# Altium PCB activediffprobe.PcbDoc
Units mil, origin at the board's own origin, x right, y up, seen from the top; angles counter-clockwise.
Board outline 2716.54 x 1299.21 mil, 2 copper layers (Top Layer, Bottom Layer), stack 61.811 mil thick; 54 components, 26 nets, 201 pads, 87 vias.
Unrouted connection lines stored in the file: 44.
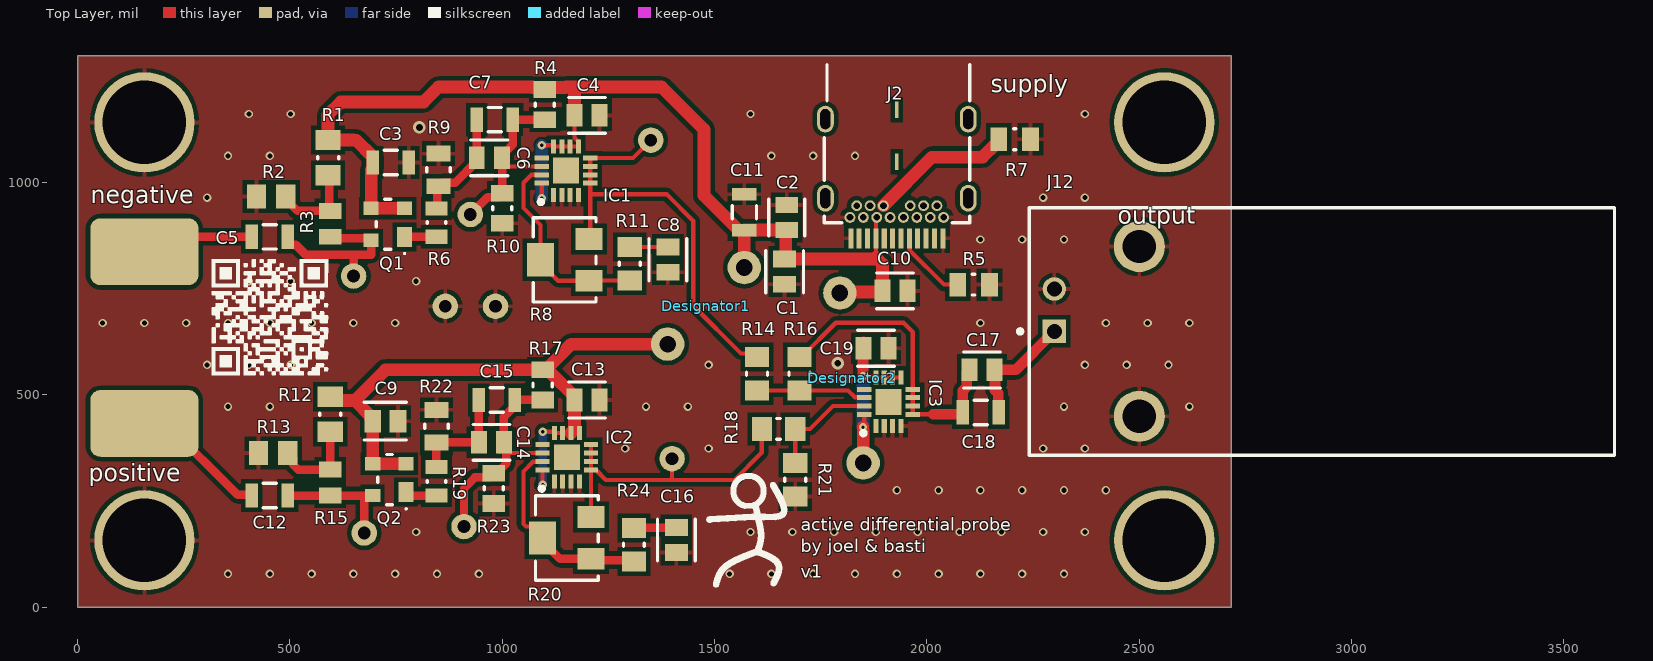
[diagram p0: Top Layer view]
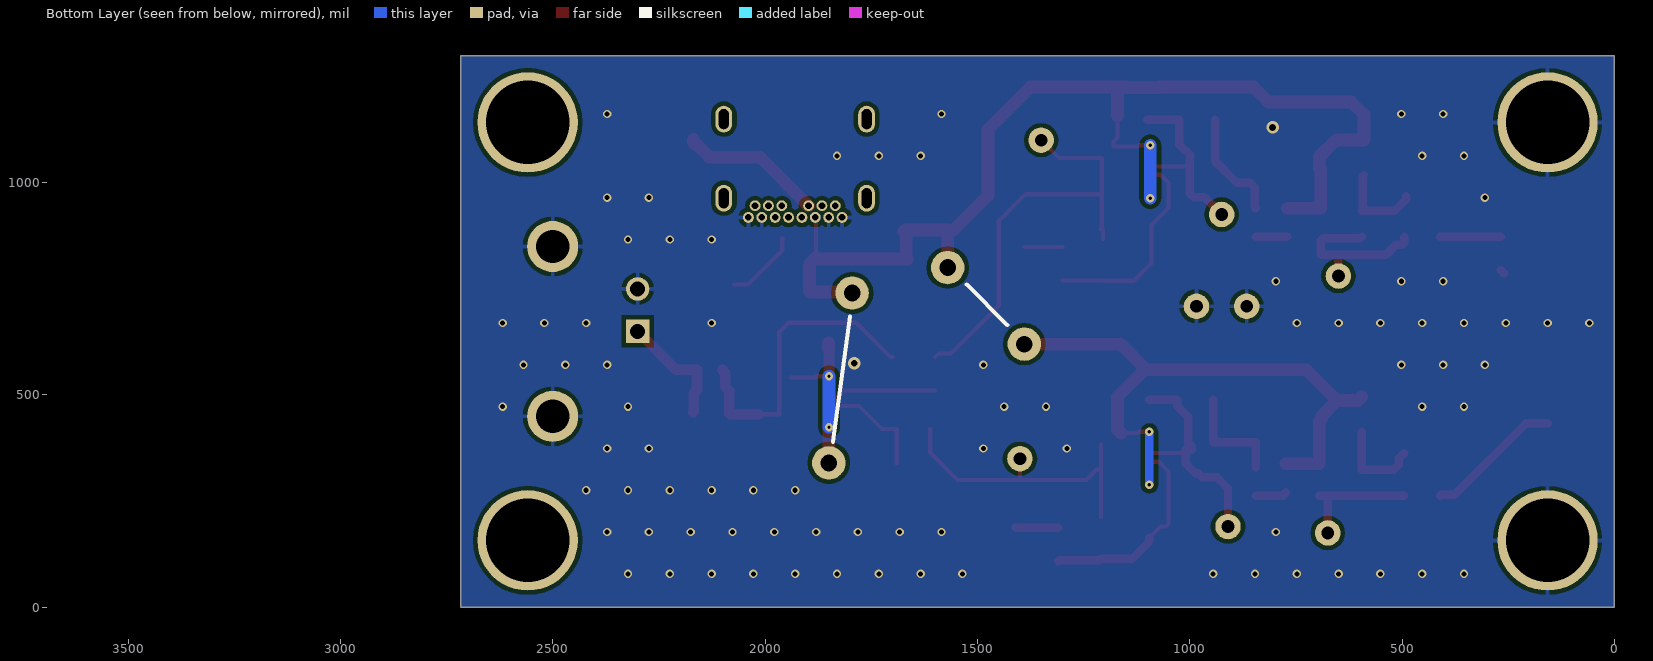
[diagram p1: Bottom Layer view, seen from below]
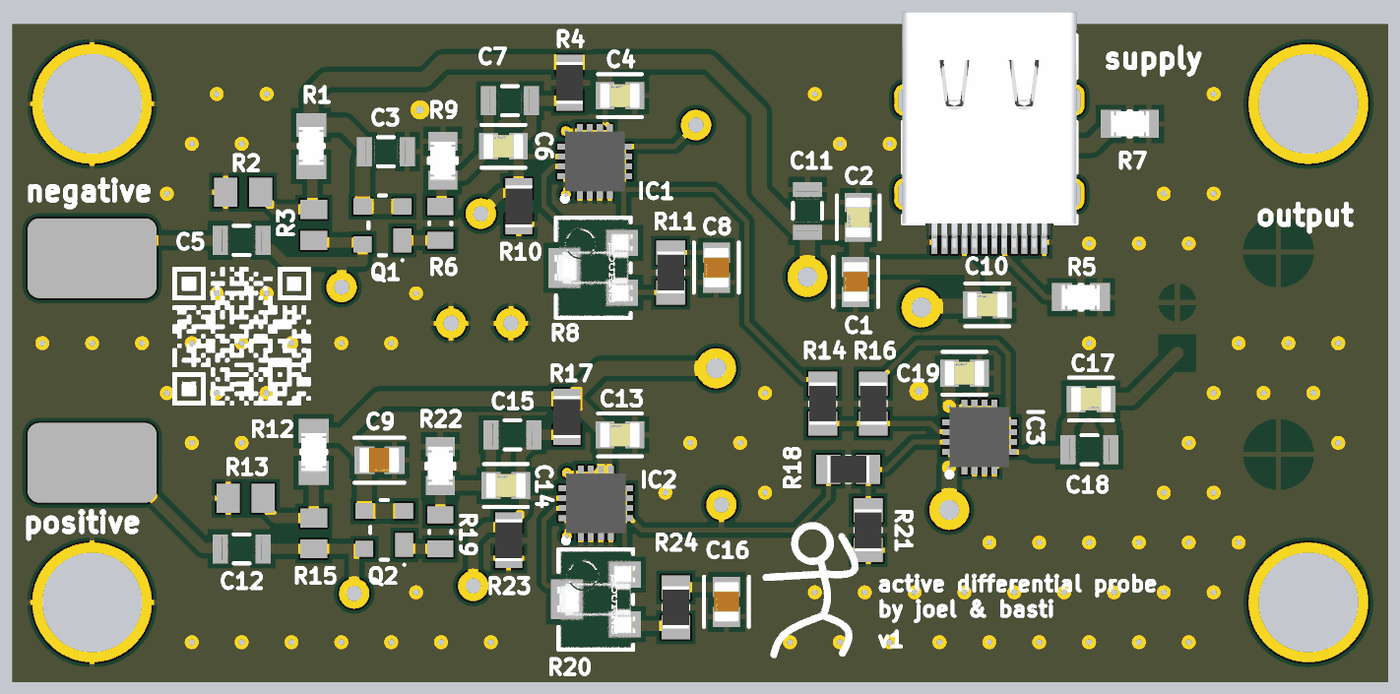
[diagram p2: 3D render of the assembled board from above, using the file's embedded part models]

## Layer stack, top to bottom
Top Solder: solder mask 0.5, Solder Resist, Dk 3.8
Top Layer: signal copper 1.378
Dielectric: core 59.055, FR-4, Dk 4.5
Bottom Layer: signal copper 1.378
Bottom Solder: solder mask 0.5, Solder Resist, Dk 3.8

## Board outline
0,0 0,1299.21 2716.54,1299.21 2716.54,0

## Design rules (kind name [scope] priority, off if disabled: settings)
Clearance [All] p1: gap=10 ignorepadtopadclearanceinfootprint=TRUE except(0: Arc-Hole Track-Hole SMDPad-Hole THPad-Hole Via-Hole Fill-Hole Poly-Hole Region-Hole Text-Hole)
PolygonConnect [All] p1: thpad.connectstyle=Relief thpad.reliefconductorwidth=10 thpad.reliefentries=4 thpad.polygonreliefangle="90 Angle" thpad.airgapwidth=10 smdpad.connectstyle=Relief smdpad.reliefconductorwidth=10 smdpad.reliefentries=4 smdpad.polygonreliefangle="90 Angle" smdpad.airgapwidth=10 via.connectstyle=Direct via.reliefconductorwidth=10 via.reliefentries=4 via.polygonreliefangle="90 Angle" via.airgapwidth=10
RoutingVias [All] p1: holewidth=28 width=50 viastyle="Through Hole" minholewidth=28 minwidth=50 maxholewidth=28 maxwidth=50
SolderMaskExpansion [All] p1: expansion=4 istentingtop=FALSE
Width 50R [InNet('NetC17_1')] p1: maxlimit=24.88 minlimit=24.88 preferedwidth=47.12 impedanceprofiledriven=TRUE impedanceprofileid={2A154028-B5BE-423F-ACD5-3DD682D5A0E4} impedanceprofilevalue=50.000000 minimp=50.000000 maximp=50.000000 favimp=50.000000
Width [All] p2: maxlimit=50 minlimit=10 preferedwidth=25 minimp=50.000000 maximp=50.000000 favimp=50.000000
30 further rules are at their usual default settings.

## Classes and differential pairs
component class Sheet2: C1 C2 C3 C4 C5 C6 C7 C8 C9 C10 C11 C12 C13 C14 C15 C16 C17 C18 C19 IC1 IC2 IC3 J2 J12 negative positive Q1 Q2 R2 R3 R4 R5 R6 R7 R8 R9 R10 R11 R12 R13 R14 R15 R16 R17 R18 R19 R20 R21 R22 R24

## Components (designator, comment, footprint, x,y, rotation, side; value= is the part's Value field where it differs from the comment)
C1 "LMR212BD7106KG-T" FP-0805-L_2_0_0_2-W_1_25-IPC_C 1665,790.39 r270 top
C2 "C0805C104K5RAC7411" FP-C0805C-DN-MFG 1670.08,917.72 r90 top locked value="0.10 μF"
C3 "CGA4F3X7R2E102K085AE" FP-CGA4J-IPC_B 737.4,1047.42 r0 top locked
C4 "C0805C104K5RAC7411" FP-C0805C-DN-MFG 1199.61,1158.19 r0 top locked value="0.10 μF"
C5 "CGA4F3X7R2E102K085AE" FP-CGA4J-IPC_B 452.76,872.42 r0 top locked
C6 "C0805C104K5RAC7411" FP-C0805C-DN-MFG 969.61,1058.19 r0 top locked value="0.10 μF"
C7 "CGA4F3X7R2E102K085AE" FP-CGA4J-IPC_B 982.4,1148.19 r0 top locked
C8 "LMR212BD7106KG-T" FP-0805-L_2_0_0_2-W_1_25-IPC_C 1390.08,818.58 r270 top locked
C9 "LMR212BD7106KG-T" FP-0805-L_2_0_0_2-W_1_25-IPC_C 724.69,438.19 r0 top locked
C10 "C0805C104K5RAC7411" FP-C0805C-DN-MFG 1925,745 r0 top value="0.10 μF"
C11 "CGA4F3X7R2E102K085AE" FP-CGA4J-IPC_B 1570.08,930.51 r90 top locked
C12 "CGA4F3X7R2E102K085AE" FP-CGA4J-IPC_B 452.76,263.19 r0 top locked
C13 "C0805C104K5RAC7411" FP-C0805C-DN-MFG 1199.61,488.19 r0 top locked value="0.10 μF"
C14 "C0805C104K5RAC7411" FP-C0805C-DN-MFG 974.61,388.19 r0 top locked value="0.10 μF"
C15 "CGA4F3X7R2E102K085AE" FP-CGA4J-IPC_B 987.4,488.19 r0 top locked
C16 "LMR212BD7106KG-T" FP-0805-L_2_0_0_2-W_1_25-IPC_C 1410.08,158.58 r270 top locked
C17 "C0805C104K5RAC7411" FP-C0805C-DN-MFG 2129.92,558.86 r180 top locked value="0.10 μF"
C18 "CGA4F3X7R2E102K085AE" FP-CGA4J-IPC_B 2126.77,458.86 r180 top locked
C19 "C0805C104K5RAC7411" FP-C0805C-DN-MFG 1880,610 r0 top value="0.10 μF"
Designator1 "Comment" Jumper#1 1389.69,619.69 r45 top
Designator2 "Comment" Jumper#2 2025,660 r270 top
IC1 "THS4302RGTR" QFN50P300X300X100-17N-D 1150.08,1028.19 r90 top locked
IC2 "THS4302RGTR" QFN50P300X300X100-17N-D 1152.17,353.35 r90 top locked
IC3 "THS4302RGTR" QFN50P300X300X100-17N-D 1909.45,483.86 r90 top locked
J2 "632723100011" 632723100011 1929.13,1102.36 r180 top locked
J12 "031-5540" FP-031-5540-MFG 2930.08,649.61 r90 top
negative "WIRE_PAD_7x4" WIRE_PAD_7x4-Footprint-1 157.48,837.18 r180 top locked (schematic designator negative-probe1)
positive "WIRE_PAD_7x4" WIRE_PAD_7x4-Footprint-1 157.48,433.07 r180 top locked (schematic designator positive-probe1)
Q1 "BF998" INF-SOT143-4-1_V 730.71,901.94 r180 top locked
Q2 "BF998" INF-SOT143-4-1_V 734.45,300.59 r180 top locked
R1 "CRCW08056K80FKEA" FP-CRCW0805-e3-IPC_A 590.08,1058.79 r90 top locked
R2 "ERJ-6ENF4701V" RESC2013X70X40NL20T20 455.63,967.42 r0 top locked
R3 "ERJ-6GEYJ106V" RESC2013X70X40LL20T20 595.08,902.93 r90 top locked
R4 "RC0805FR-0710KL" RESC2013X60X35NL10T20 1100.08,1183.62 r90 top locked
R5 "CRCW080556K0FKEA" FP-CRCW0805-e3-IPC_B 2110,760 r180 top
R6 "2R4 5% 0805(2012)" RESC0805(2012)_L 845.08,905.88 r270 top locked value="2.40 Ohm"
R7 "CRCW080556K0FKEA" FP-CRCW0805-e3-IPC_B 2206.66,1102.36 r0 top locked
R8 "3224W-1-103E" FP-3224W-MFG 1147.17,818.19 r180 top locked value=10kΩ
R9 "CRCW080524R0FKEA" FP-CRCW0805-e3-MFG 850.08,1029.8 r270 top locked
R10 "RC0805FR-0710KL" RESC2013X60X35NL10T20 1000,939.57 r90 top locked
R11 "RC0805FR-071KL" RESC2013X60X35ML10T20 1300.08,808.82 r270 top locked
R12 "CRCW08056K80FKEA" FP-CRCW0805-e3-IPC_A 595.08,454.56 r90 top locked
R13 "ERJ-6ENF4701V" RESC2013X70X40NL20T20 460.63,363.19 r0 top locked
R14 "RC0805FR-071KL" RESC2013X60X35ML10T20 1600,550 r90 top
R15 "ERJ-6GEYJ106V" RESC2013X70X40LL20T20 595.08,293.7 r90 top locked
R16 "RC0805FR-071KL" RESC2013X60X35ML10T20 1700,550 r270 top
R17 "RC0805FR-0710KL" RESC2013X60X35NL10T20 1095.08,523.62 r90 top locked
R18 "RC0805FR-071KL" RESC2013X60X35ML10T20 1650.63,420 r180 top locked
R19 "2R4 5% 0805(2012)" RESC0805(2012)_L 845.08,296.65 r270 top locked value="2.40 Ohm"
R20 "3224W-1-103E" FP-3224W-MFG 1152.17,163.19 r180 top locked value=10kΩ
R21 "RC0805FR-071KL" RESC2013X60X35ML10T20 1690,300 r270 top
R22 "CRCW080524R0FKEA" FP-CRCW0805-e3-MFG 845.08,426.57 r270 top locked
R23 "RC0805FR-0710KL" RESC2013X60X35NL10T20 980,280 r90 top
R24 "RC0805FR-071KL" RESC2013X60X35ML10T20 1310.08,147.56 r270 top locked

## Footprints (in the part's own frame and the unit in brackets; to place one, negate y for a bottom-side part, rotate by r counter-clockwise, add the part's x,y. Pads: shape width x height; smd on the part's side, far side on the other; paste and mask are expansions set on the pad)
632723100011 [mm] "USB 3.1 Type C Receptacle Horizontal THR"
  rect 0.3x1.2 smd: A1(-2.75,5.93) A2(-2.25,5.93) A3(-1.75,5.93) A4(-1.25,5.93) A5(-0.75,5.93) A6(-0.25,5.93) A7(0.25,5.93) A8(0.75,5.93) A9(1.25,5.93) A10(1.75,5.93) A11(2.25,5.93) A12(2.75,5.93)
  round 0.65 hole 0.4: B1(2.8,4.68) B2(2.4,3.98) B3(1.6,3.98) B4(1.2,4.68) B5(0.8,3.98) B6(0.4,4.68) B7(-0.4,4.68) B8(-0.8,3.98) B9(-1.2,4.68) B10(-1.6,3.98) B11(-2.4,3.98) B12(-2.8,4.68) G1(2,4.68) G2(-2,4.68)
  oval 1x1.6 hole 0.6 slot 1.2 at 90 deg: Shell(-4.27,3.53) Shell(-4.27,-1.2) Shell(4.27,3.53) Shell(4.27,-1.2)
  rect 0.2x1 smd: Shell(0,1.35) Shell(0,-1.75)
  silkscreen extent -4.37,-4.45 4.34,5, body extent -4.37,-5.6 4.37,6.19, height 3.05
FP-031-5540-MFG [mm]
  rect 1.4x1.4 hole 0.9 paste-1000 mask+0: 1(0,16)
  round 1.4 hole 0.9 paste-1000 mask+0: 2(2.54,16)
  round 3.05 hole 2 paste-1000 mask+0: 3(-5.08,10.92) 4(5.08,10.92)
  silkscreen extent -7.4,-17.5 7.4,18.17, body extent -7.5,-17.6 7.5,17.6, height 0.25
FP-0805-L_2_0_0_2-W_1_25-IPC_C [mil]
  rect 39.68x53.63 smd paste+0 mask+0: 1(-29.61,0) 2(29.61,0)
  silkscreen extent -49,-44 49,44, body extent -53,-32 53,32, height 10
FP-3224W-MFG [mm]
  rect 1.6x1.3 smd paste+0 mask+0: 1(-1.45,1.25) 3(-1.45,-1.25)
  rect 1.6x2 smd paste+0 mask+0: 2(1.45,0)
  silkscreen extent -1.88,-2.52 1.88,2.52, body extent -2.35,-2.63 2.35,2.63, height 0.25
FP-C0805C-DN-MFG [mm]
  rect 0.95x1.35 smd paste+0 mask+0: 1(-0.75,0) 2(0.75,0)
  silkscreen extent -1.1,-1.07 1.1,1.07, body extent -1.4,-0.85 1.4,0.85, height 0.25
FP-CGA4J-IPC_B [mm]
  rect 0.756x1.456 smd paste+0 mask+0: 1(-1.075,0) 2(1.075,0)
  silkscreen extent -0.4,-0.73 0.4,0.73, body extent -1.7,-0.98 1.7,0.98, height 0.25
FP-CRCW0805-e3-IPC_A [mil]
  rect 47.5x59.38 smd paste+0 mask+0: 1(-41.37,0) 2(41.37,0)
  silkscreen extent -3,-25 3,25, body extent -85,-49 85,49, height 10
FP-CRCW0805-e3-IPC_B [mil]
  rect 39.63x55.44 smd paste+0 mask+0: 1(-37.44,0) 2(37.44,0)
  silkscreen extent -3,-25 3,25, body extent -67,-38 67,38, height 10
FP-CRCW0805-e3-MFG [mm]
  rect 0.95x1.45 smd paste+0 mask+0: 1(-0.975,0) 2(0.975,0)
  silkscreen extent -0.13,-0.7 0.13,0.7, body extent -1.55,-0.82 1.55,0.82, height 0.25
INF-SOT143-4-1_V [mm] "SOT143, 4-Leads, Body 2.9x1.3 mm"
  rect 0.9x1.2 smd: 1(-1,0.75)
  rect 0.9x0.8 smd: 2(-1,-0.95) 3(1,-0.95) 4(1,0.95)
  silkscreen extent -1.05,-1.5 0.7,1.8, body extent -0.65,-1.45 0.65,1.45, height 1.1
Jumper#1 [mm]
  round 2 hole 1: 1(0,0) 2(6.477,0)
Jumper#2 [mm]
  round 2 hole 1: 1(-2.032,-5.842) 2(8.128,-4.445)
QFN50P300X300X100-17N-D [mm]
  rect 0.85x0.3 smd: 1(-1.45,0.75) 2(-1.45,0.25) 3(-1.45,-0.25) 4(-1.45,-0.75) 9(1.45,-0.75) 10(1.45,-0.25) 11(1.45,0.25) 12(1.45,0.75)
  rect 0.3x0.85 smd: 5(-0.75,-1.45) 6(-0.25,-1.45) 7(0.25,-1.45) 8(0.75,-1.45) 13(0.75,1.45) 14(0.25,1.45) 15(-0.25,1.45) 16(-0.75,1.45)
  rect 1.55x1.55 smd: 17(0,0)
  silkscreen extent -2,1.37 -1.75,1.62, body extent -1.5,-1.5 1.5,1.5, height 1
RESC0805(2012)_L [mm] "Chip Resistor, Body 2.0x1.3mm, IPC High Density"
  rect 0.85x1.3 smd: 1(-0.85,0) 2(0.85,0)
  silkscreen extent -0.05,-0.55 0.05,0.55, body extent -1.1,-0.67 1.1,0.68, height 0.7
RESC2013X60X35ML10T20 [mm] "Chip Resistor, 2-Leads, Body 2.1x1.35mm, IPC Low Density"
  rect 1.2x1.45 smd: 1(-1,0) 2(1,0)
  silkscreen extent -0.1,-0.63 0.1,0.63, body extent -1.05,-0.68 1.05,0.67, height 0.6
RESC2013X60X35NL10T20 [mm] "Chip Resistor, 2-Leads, Body 2.1x1.35mm, IPC Medium Density"
  rect 1x1.35 smd: 1(-0.9,0) 2(0.9,0)
  silkscreen extent -0.1,-0.58 0.1,0.58, body extent -1.05,-0.68 1.05,0.67, height 0.6
RESC2013X70X40LL20T20 [mm] "Chip Resistor, 2-Leads, Body 2.00x1.25mm, IPC High Density"
  rect 0.95x1.35 smd: 1(-0.775,0) 2(0.775,0)
  body extent -1.1,-0.72 1.1,0.72, height 0.7
RESC2013X70X40NL20T20 [mm] "Chip Resistor, 2-Leads, Body 2.2x1.35mm, IPC Medium Density"
  rect 1.15x1.45 smd: 1(-0.875,0) 2(0.875,0)
  body extent -1.1,-0.72 1.1,0.72, height 0.7
WIRE_PAD_7x4-Footprint-1 [mm]
  rrect30% 6.472x4 smd mask+0.102: 1(0,0)

## Part data
C1 C8 C9 C16: library part CMP-14477-005320-1, "Multilayer Ceramic Capacitor 10uF 10V X7T 10% SMD 0805 Automotive T/R", RoHS Compliant=Yes
C2 C4 C6 C10 C13 C14 C17 C19: library part CMP-2007-00277-3, "C0805 0.10 μF X7R 30ppm/°C 10.00% 50 V", Capacitance="0.10 μF", Manufacturer=KEMET, Package=C0805C-DN, Temperature="-55°C to +125°C", Temperature Characteristic=X7R, Temperature Coefficient=30ppm/°C, Temperature Range High=+125°C, Temperature Range Low=-55°C, Tolerance=0.1, Voltage Rating="50 V", Automotive=No, Category=Cap, ComponentLink2Description=Datasheet, ComponentLink2URL=https://content.kemet.com/datasheets/KEM_C1003_C0G_SMD.pdf, Device Class L1="Passive Components", Device Class L2=Capacitors, Device Class L3="Ceramic Capacitors", Height=0.88mm, Ipc Land Pattern Name=CAPC200125X78, Lead Free=Yes, Manufacturer Part Number=C0805C104K5RAC7411, Material=Ceramic, Octopart=https://octopart.com/c0805c104k5rac7411-kemet-18508045, RoHS=TRUE
C3 C5 C7 C11 C12 C15 C18: library part CMP-08246-002356-1, "Cap Ceramic 1nF 250V X7R 10% Pad SMD 0805 +125°C Automotive T/R", Capacitance=1nF, Case Code (Imperial)=0805, Case Code (Metric)=2012, Max Operating Temperature=125°C, Min Operating Temperature=-55°C, Ratings=AEC-Q200, Tolerance=10%, Voltage Rating=250V, Case/Package=0805, Features="Soft Termination", Length=0.079inch, Mount="Surface Mount", Packaging="Tape and Reel", Thickness=0.039inch, Width=0.047inch
IC1 IC2 IC3: "Integrated Circuit", Manufacturer_Name="Texas Instruments", Datasheet Link=http://www.ti.com/lit/gpn/ths4302, Height=1mm, Manufacturer_Part_Number=THS4302RGTR
J2: library part CMP-1502-03213-1, "USB 3.1 Type C Receptacle WR-COM, Horizontal, SMT / THT", Contact Resistance=30mOhm, Manufacturer="Wurth Elektronik", Operating Temperature=-40to105degC, Rated Current=5A, Working Voltage=20VDC, Connector Type=USB3.1TypeC, Datasheet URL=https://katalog.we-online.de/em/datasheet/632723x00011%282%29.pdf, Gender=Receptacle, Manufacturer URL=http://www.we-online.de, Mounting Technology=SMT/THT, Orientation=Horizontal, Package Reference=632723100011, Packaging=TapeandReel, Part Number=632723100011, Publisher=WurthElektronik
J12: library part CMP-20040-000002-1, "CONN BNC RCPT R/A 50 OHM PCB", Dielectric Material=Polypropylene, Frequency=1GHz, Manufacturer="Amphenol RF", Package=0, Temperature="-55°C to +85°C", Temperature Range High=+85°C, Temperature Range Low=-55°C, Automotive=No, Category=Conn, ComponentLink2Description=Datasheet, ComponentLink2URL=https://www.amphenolrf.com/downloads/dl/file/id/2040/product/579/031_5540_customer_drawing.pdf, Conn Orientation="Right Angle", Contact Material=Gold,Nickel, Device Class L1=Connectors, Device Class L2="RF / Coaxial Connectors", Device Class L3=unset, Digikey Description="CONN BNC RCPT R/A 50 OHM PCB", Height=13.4mm, Impedance=50Ω, Is Female=yes, Lead Free=Yes, Manufacturer Part Number=031-5540, Number of Contacts=2, Octopart=https://octopart.com/031-5540-amphenol+rf-49742301, Pitch=2.54mm, RoHS=TRUE
negative positive: library part CMP-019-00043-3, "SMD WIRE PAD 7 x 4 mm", Pins=1
Q1 Q2: library part CMP-1193-00001-1, "Silicon N-Channel MOSFET Tetrode, 30 mA ID, 20 dB Gp, SOT143-4-1, Green", Manufacturer=Infineon, ComponentLink1Description="Manufacturer URL", ComponentLink1URL=http://www.infineon.com/, ComponentLink2Description=Datasheet, ComponentLink2URL=http://www.infineon.com/dgdl/bf998series.pdf?folderId=db3a30431441fb5d0114936599851041&fileId=db3a30431441fb5d011493688fd31042&location=en.Products.RF.RF_MOSFET.Single_Non_Biased.DATASHEET.bf998series.pdf, ComponentLink3Description="Package Specification", ComponentLink3URL=http://www.infineon.com/dgdl/SOT143-Package_Overview.pdf?folderId=db3a30431936bc4b011952ce8b1b3bed&fileId=db3a30431936bc4b011952df42203c0c, DatasheetVersion=Apr-2007, F (typ)="1.8 dB", gfs (typ)="24 mS", Gp (typ)="20 dB", Green=yes, ID (max)="30 mA", Mounting Technology="Surface Mount", PackageDescription="4-Pin Small Outline Transistor Package, 1.3 x 2.9 mm Body", PackageReference=SOT143-4-1, PartNumber=BF998, Ptot (max)="200 mW"
R1 R12: library part CMP-2001-04088-2, "RES Thick Film, 6.8kΩ, 1%, 0.125W, 100ppm/°C, 0805", Case Code (Imperial)=0805, Case Code (Metric)=2012, Max Operating Temperature=155°C, Max Power Dissipation=125mW, Min Operating Temperature=-55°C, Package Quantity=10, Resistance=6.8kR, Temperature Coefficient=100ppm/°C, Tolerance=1%, Voltage Rating=150V, Case/Package=0805, Composition="Thick Film", Contact Plating=Tin, Depth=1.25mm, Features="Automotive AEC-Q200", Height=0.45mm, Lead Free="Lead Free", Length=2mm, Military Standard=Not, Mount="Surface Mount", Number of Terminations=2, Packaging="Tape and Reel", Power Rating=125mW, Radiation Hardening=No, Termination=SMD/SMT, Voltage Rating (DC)=150V, Weight=0.000194oz, Width=0.049inch
R2 R13: library part CMP-2001-00550-5, "Chip Resistor, 4.7 KOhm, +/- 1%, 0.125 W, -55 to 155 degC, 0805 (2012 Metric), RoHS, Tape and Reel", Manufacturer=Panasonic, Max Operating Temperature="155 degC", Min Operating Temperature="-55 degC", Package Quantity=5000, Voltage Rating="150 V", ComponentLink1Description="Manufacturer URL", ComponentLink1URL=http://www.panasonic.com/, ComponentLink2Description=Datasheet, ComponentLink2URL=http://industrial.panasonic.com/cdbs/www-data/pdf/RDA0000/AOA0000C86.pdf, DatasheetVersion=04/2015, Height="0.6 mm", Length="2 mm", Mount="Surface Mount", Mounting Technology="Surface Mount", PackageDescription="2-Pin Surface Mount Device, Body 2 x 1.25 mm", PackageReference=0805, Packaging="Tape and Reel", Pins=2, REACH SVHC=Yes, RoHSCompliant=true
R3 R15: library part CMP-2001-00340-1, "10MOhm", Manufacturer=Panasonic, Part Number=ERJ-6GEYJ106V
R4 R10 R17 R23: library part CMP-1659-00013-4, "Chip Resistor, 10 KOhm, +/- 1%, 0.125 W, -55 to 155 degC, 0805 (2012 Metric), RoHS, Tape and Reel", Manufacturer=Yageo, Max Operating Temperature="155 degC", Min Operating Temperature="-55 degC", Package Quantity=5000, Voltage Rating="150 V", ComponentLink1Description="Manufacturer URL", ComponentLink1URL=http://www.yageo.com/, ComponentLink2Description=Datasheet, ComponentLink2URL=http://www.yageo.com/documents/recent/PYu-RC_Group_51_RoHS_L_04.pdf, DatasheetVersion="Rev. 4, 02/2016", Height="0.5 mm", Length="2 mm", Mount="Surface Mount", Mounting Technology="Surface Mount", PackageDescription="2-Pin Surface Mounted Device, Body 2 x 1.25 mm", PackageReference=0805, Packaging="Tape and Reel", Pins=2, REACH SVHC="No SVHC", RoHSCompliant=true
R5 R7: library part CMP-2001-04015-2, "RES Thick Film, 56kΩ, 1%, 0.125W, 100ppm/°C, 0805", Case Code (Imperial)=0805, Case Code (Metric)=2012, Max Operating Temperature=155°C, Max Power Dissipation=125mW, Min Operating Temperature=-55°C, Package Quantity=10, Resistance=56kR, Temperature Coefficient=100ppm/°C, Tolerance=1%, Voltage Rating=150V, Case/Package=0805, Composition="Thick Film", Contact Plating=Tin, Depth=1.25mm, Features="Automotive AEC-Q200", Height=0.45mm, Lead Free="Lead Free", Length=2mm, Military Standard=Not, Mount="Surface Mount", Number of Pins=2, Number of Terminations=2, Packaging="Tape and Reel", Power Rating=125mW, Radiation Hardening=No, Termination=SMD/SMT, Voltage Rating (DC)=150V, Weight=0.000194oz, Width=1.25mm
R6 R19: library part CMP-1013-00011-1, "2R4 0.125W 5% 0805 (2012 Metric)  SMD", Case-EIA=0805, Case-Metric=2012, Power="0.125 W", Tolerance="5 %", Technology=SMT
R8 R20: library part CMP-2000-05077-2, "TRIMMER 10K OHM 0.25W J LEAD TOP", Manufacturer=Bourns, Package=3224W, Power Rating=250mW, Resistance=10kΩ, Temperature="-65°C to +150°C", Temperature Coefficient=100ppm/°C, Temperature Range High=+150°C, Temperature Range Low=-65°C, Tolerance=10%, Voltage Rating=300V, Automotive=No, Category=Res, ComponentLink2Description=Datasheet, ComponentLink2URL=https://upverter.com/datasheet/a166fca85da25564670351d2dc712345c058bc40.pdf, Composition=Cermet, Device Class L1="Passive Components", Device Class L2=Resistors, Device Class L3="Variable Resistors and Potentiometers", Digikey Description="TRIMMER 10K OHM 0.25W J LEAD TOP", Height=5.55mm, Lead Free=Yes, Manufacturer Part Number=3224W-1-103E, Mouser Description="Trimmer Resistors - SMD 4mm 10Kohms 10% Square Cermet Sealed", Octopart=https://octopart.com/3224w-1-103e-bourns-14818, RoHS=TRUE, Series=3224, Standoff Height=0.2mm
R9 R22: library part CMP-2001-03718-2, "RES Thick Film, 24Ω, 1%, 0.125W, 100ppm/°C, 0805", Case Code (Imperial)=0805, Case Code (Metric)=2012, Max Operating Temperature=155°C, Max Power Dissipation=125mW, Min Operating Temperature=-55°C, Package Quantity=10, Resistance=24R, Temperature Coefficient=100ppm/°C, Tolerance=1%, Voltage Rating=150V, Case/Package=0805, Composition="Thick Film", Contact Plating=Tin, Depth=1.25mm, Features="Automotive AEC-Q200", Height=0.45mm, Lead Free="Lead Free", Length=2mm, Military Standard=Not, Mount="Surface Mount", Number of Pins=2, Number of Terminations=2, Packaging="Tape and Reel", Power Rating=125mW, Radiation Hardening=No, Termination=SMD/SMT, Voltage Rating (DC)=150V, Weight=0.000194oz, Width=0.049inch
R11 R14 R16 R18 R21 R24: library part CMP-2100-03671-1, "Chip Resistor, 1 KOhm, +/- 1%, 125 mW, -55 to 155 degC, 0805 (2012 Metric), RoHS, Tape and Reel", Case Code (Imperial)=0805, Case Code (Metric)=2012, Manufacturer=Yageo, Max Operating Temperature=155degC, Max Power Dissipation=125mW, Min Operating Temperature=-55degC, Package Description="2-Pin Surface Mounted Device, Body 2 x 1.25 mm", Package Quantity=1, Resistance=1KOhm, Temperature Coefficient=100ppm/degreesC, Tolerance=1%, Voltage Rating=150V, Case/Package=0805, Composition=ThickFilm, Datasheet URL=http://www.yageo.com/NewPortal/yageodocoutput?fileName=/pdf/R-Chip/PYu-RC_Group_51_RoHS_L_5.pdf, Datasheet Version="Rev. 5, 10/2016", Depth=1.25mm, Height=0.024inch, Lead Free=LeadFree, Length=0.079inch, Manufacturer URL=http://www.yageo.com/, Military Standard=Not, Number of Pins=2, Number of Terminations=2, Package Reference=0805, Packaging=TapeandReel, Power Rating=125mW, REACH SVHC=Unknown, RoHSCompliant=true, Termination=SMD/SMT, Voltage Rating (DC)=150V, Width=0.049inch

## Free pads (board coordinates)
  round 60 hole 30: 1(925,925) 2(675,175) 4(910,190) 5(1350,1100) 6(1400,350) 7(866.14,708.66) 8(984.25,708.66) 9(650,780)
  round 236.22 hole 196.85: 10(2559.06,1141.73) 11(2559.06,157.48) 12(157.48,157.48) 13(157.48,1141.73)

## Via types
v1: diameter 19.68, hole 11.81, Top Layer to Bottom Layer, 79 vias
v2: diameter 19.68, hole 7.87, Top Layer to Bottom Layer, 6 vias
v3: diameter 29.53, hole 15.75, Top Layer to Bottom Layer, 2 vias

## Nets (pads, with @x,y where several pads share a name; then routed paths per layer and width w, separated by ;. In a path a pad name is that pad's centre, name@x,y a point inside that pad or via, vN(x,y) a via of type N, cw(c..) or ccw(c..) an arc to the next point about the centre after c; other vN are vias at no path point)
+5: C1.1 C2.1 C3.1 C4.1 C9.1 C10.1 C11.1 C13.1 C19.1 Designator1.1 Designator1.2 Designator2.1 Designator2.2 IC1.9 IC1.10 IC1.11 IC1.12 IC1.16 IC2.9 IC2.10 IC2.11 IC2.12 IC2.16 IC3.9 IC3.10 IC3.11 IC3.12 IC3.16 J2.A9 J2.B4 Q1.2 Q1.3 Q2.2 Q2.3 R1.2 R4.2 R12.2 R17.2 | length 4669.2
  Top Layer w10: v2(1092.99,963.03) IC1.16 ; v2(1092.99,1088.03) 1119.65,1088.03 1120.55,1087.13 IC1.12 IC1.11 IC1.10 IC1.9 1179.61,1096.1 1170.08,1105.63 C4.1 ; IC2.16@1094.17,322.91 1095.08,322.91 v2(1095.08,288.19) ; v2(1095.08,413.19) 1121.73,413.19 1122.64,412.28 IC2.12 IC2.11 IC2.10 ; v2(1849.45,423.86) 1849.45,426.48 1852.36,429.39 IC3.16 ; v2(1849.45,543.86) 1879.02,543.86 1879.92,542.95 IC3.12 IC3.11 IC3.10 IC3.9 ; 1879.92,823.96 J2.A9 1879.92,916.14 J2.B4 ; 1880,820 1880,823.88
  Top Layer w25: v2(1849.45,543.86) 1849.45,608.98 C19.1
  Top Layer w30: R12.2 603.83,487.18 653.06,487.18 ; Q1.2 Q1.3 691.34,1030.12 695.08,1033.86 C3.1 695.08,1060.97 656.05,1100 650,1100 649.84,1100.16 R1.2 590,1100.24 590,1160 620,1190 815,1190 850,1225 1070.93,1225 1072.19,1223.74 1148.74,1223.74 1150,1225 1170.08,1225 ; Q2.2 Q2.3 C9.1 690.24,443.03 690.24,450 653.06,487.18 ; R17.2@1111.77,554.37 1170.08,496.06 C13.1 1170.08,418.5 IC2.10 ; C4.1 1170.08,1225 ; Designator1.1 1162.6,619.69 1101.97,559.06 R17.2 724.93,559.06 653.06,487.18 ; C11.1@1556.53,888.19 1475,969.72 1475,1125 1375,1225 1170.08,1225 ; Designator1.2 1570.04,800.04 C11.1 ; C11.1 C2.1 ; C1.1 1880,820 ; C1.1@1667.54,822.54 1667.54,885.65 C2.1 ; C2.1@1673.78,884.49 C2.1 ; Designator2.1 1797.5,742.5 1892.97,742.5 C10.1 1895.47,808.41 1880,823.88 1879.92,823.96 ; v2(1849.45,423.86) 1850,423.31 Designator2.2 ; C19.1 C19.1@1850.47,622.13
  Bottom Layer w20: v2(1095.08,288.19) v2(1095.08,413.19)
  Bottom Layer w25: J2.B4@1881.78,918 J2.B4
  Bottom Layer w30: v2(1092.99,963.03) v2(1092.99,1088.03) ; v2(1849.45,423.86) v2(1849.45,543.86)
GND: C1.2 C2.2 C3.2 C4.2 C8.2 C9.2 C10.2 C11.2 C13.2 C16.2 C19.2 IC1.1 IC1.2 IC1.3 IC1.4 IC1.17 IC2.1 IC2.2 IC2.3 IC2.4 IC2.17 IC3.1 IC3.2 IC3.3 IC3.4 IC3.17 J2.A1 J2.A12 J2.B1 J2.B12 J2.G1 J2.G2 J12.2 J12.3 J12.4 pad.7 pad.8 pad.12 pad.13 R2.1 R5.1 R7.2 R9.1 R10.1 R13.1 R21.2 R22.1 R23.1
  other v1: 354.33,78.74 452.76,78.74 551.18,78.74 649.61,78.74 748.03,78.74 846.46,78.74 944.88,78.74 1535.43,78.74 1633.86,78.74 1732.28,78.74 1830.71,78.74 1929.13,78.74 2027.56,78.74 2125.98,78.74 2224.41,78.74 2322.83,78.74 797.24,177.17 1584.65,177.17 1683.07,177.17 1781.5,177.17 1879.92,177.17 1978.35,177.17 2076.77,177.17 2175.2,177.17 2273.62,177.17 2372.05,177.17 1929.13,275.59 2027.56,275.59 2125.98,275.59 2224.41,275.59 2322.83,275.59 2421.26,275.59 1289.37,374.02 1486.22,374.02 2273.62,374.02 2372.05,374.02 354.33,472.44 452.76,472.44 1338.58,472.44 1437.01,472.44 2322.83,472.44 2618.11,472.44 305.12,570.87 403.54,570.87 501.97,570.87 1486.22,570.87 2372.05,570.87 2470.47,570.87 2568.9,570.87 59.06,669.29 157.48,669.29 255.91,669.29 354.33,669.29 452.76,669.29 551.18,669.29 649.61,669.29 748.03,669.29 2125.98,669.29 2421.26,669.29 2519.69,669.29 2618.11,669.29 403.54,767.72 501.97,767.72 797.24,767.72 2125.98,866.14 2224.41,866.14 2322.83,866.14 305.12,964.57 2273.62,964.57 2372.05,964.57 354.33,1062.99 452.76,1062.99 1633.86,1062.99 1732.28,1062.99 1830.71,1062.99 403.54,1161.42 501.97,1161.42 1584.65,1161.42 2372.05,1161.42
  other v3: 1790,575 805,1130
NetC5_1: C5.1 negative.1 | length 153.8
  Top Layer w20: negative.1@259.84,786 negative.1@267.52,793.68 ; negative.1@267.52,872.42 C5.1
NetC5_2: C5.2 pad.9 Q1.4 R3.1 | length 406
  Top Layer w20: C5.2 495.08,858.64 499.96,853.75 513.74,853.75 537.49,830 650,830 ; R3.1 599.02,868.48 687.4,868.48 Q1.4 691.34,830 650,830 ; pad.9 650,830
NetC6_1: C6.1 C7.1 R6.1 R9.2 | length 266.4
  Top Layer w20: R6.1 847.58,941.85 847.58,988.92 R9.2 858.78,1000.12 889.88,1000.12 940.08,1050.31 C6.1 C7.1
NetC6_2: C6.2 C7.2 IC1.14 pad.1 R4.1 R10.2 | length 455.4
  Top Layer w10: C6.2 999.13,1051.73 999.57,1051.3 1012.83,1038.03 IC1.14
  Top Layer w20: pad.1 966.09,966.09 991.09,966.09 R10.2 999.57,975.43 C6.2@999.57,1051.3 ; C6.2 999.13,1066.06 1007.83,1074.76 1009.96,1074.76 1024.72,1089.52 C7.2 R4.1
NetC8_1: C8.1 R11.1 | length 90
  Top Layer w10: R11.1 C8.1
NetC12_1: C12.1 positive.1 | length 323.8
  Top Layer w20: positive.1@156.99,433.07 208.66,433.07 377.26,264.47 409.15,264.47 C12.1
NetC12_2: C12.2 pad.2 Q2.4 R15.1 | length 288.2
  Top Layer w20: C12.2 R15.1 675,263.19 ; pad.2 675,263.19 ; Q2.4 675,263.19
NetC14_1: C14.1 C15.1 R19.1 R22.2 | length 258.1
  Top Layer w20: R19.1 R22.2 C14.1 C15.1
NetC14_2: C14.2 C15.2 IC2.14 pad.4 R17.1 R23.2 | length 547.8
  Top Layer w10: C14.2@1004.13,380.31 1021.26,363.19 IC2.14
  Top Layer w20: pad.4 910,280 935.75,305.75 970.31,305.75 R23.2 986.89,315.43 1010,338.54 1010,371.61 1002.13,379.49 995.43,379.49 C14.2@995.43,370.87 ; C14.2 1004.13,448.82 1029.72,474.41 C15.2 R17.1
NetC16_1: C16.1 R24.1 | length 100.5
  Top Layer w20: R24.1 1310.71,187.56 1409.45,187.56 C16.1
NetC17_1: C17.1 C18.1 J12.1 | length 282.3
  Top Layer w24.88: C17.1 2209.41,558.86 J12.1
  Top Layer w25: C17.1 2160.52,557.79 2160.52,511.62 2167.9,504.25 2167.9,460.05 C18.1
NetC17_2: C17.2 C18.2 IC3.5 IC3.6 IC3.7 IC3.8 R16.1 | length 728.5
  Top Layer w10: R16.1 1704.92,589.37 1785.55,670 1945,670 1966.54,648.46 IC3.8 IC3.7 IC3.6 IC3.5 2014.89,454.33
  Top Layer w25: 2014.89,454.33 2082.06,454.33 C18.2@2084.45,456.72 ; C18.2 2084.45,509.45 2094.19,519.19 2094.19,552.66 C17.2
NetIC1_5: IC1.5 IC1.6 IC1.7 IC1.8 pad.5 R8.3 R14.2 | length 1022.3
  Top Layer w10: R8.3 R8.3@1204.25,890 ; R8.3@1210,890 1207.17,890 1207.17,972.79 ; pad.5 1307.72,1057.72 IC1.8 IC1.7 IC1.6 IC1.5 1207.17,972.79 ; R14.2 1591.68,597.69 1562.31,597.69 1450,710 1450,910 1387.21,972.79 1207.17,972.79
NetIC1_15: IC1.15 R8.1 R8.2 R11.2 | length 483.9
  Top Layer w10: IC1.15 1068.83,1018.35 1050,999.52 1050,940 1090.08,899.92 R8.2 1090.08,810.31 1131.42,768.98 R8.1 1204.72,769.45 R11.2
NetIC2_5: IC2.5 IC2.6 IC2.7 IC2.8 pad.6 R18.2 R20.3 | length 716.5
  Top Layer w10: R20.3 IC2.5 ; IC2.8 IC2.7 IC2.6 IC2.5 ; pad.6 1400,304.63 1395.37,300 ; R18.2 1611.26,364.41 1546.85,300 1395.37,300 ; IC2.5 1220.08,323.82 1243.9,300 1395.37,300
NetIC2_15: IC2.15 R20.1 R20.2 R24.2 | length 480.1
  Top Layer w10: R20.2 1095.08,163.79 1068.58,190.28 1055.86,190.28 1050,196.14 1050,320 1072.6,342.6 1094.17,342.6 IC2.15
  Top Layer w20: R20.2 1095.08,155.31 1136.42,113.98 R20.1 1212.15,111.08 1307.19,111.08 R24.2
NetIC3_14: IC3.14 R14.1 R16.2 | length 259.4
  Top Layer w10: R14.1 R16.2 1814.37,510.63 1830.39,494.61 1851.46,494.61 IC3.14
NetIC3_15: IC3.15 R18.1 R21.1 | length 265.4
  Top Layer w10: R21.1 R18.1 1725,420 1779.02,474.02 IC3.15
NetJ2_A5: J2.A5 R5.2 | length 175.2
  Top Layer w10: J2.A5 1959.57,867.99 1959.57,840.43 2040,760 R5.2
NetJ2_B5: J2.B5 R7.1 | length 341.1
  Top Layer w30: J2.B5 2011.97,1060 2131.3,1060 2160.94,1089.64 2164.41,1089.64 2169.22,1094.45 R7.1
NetQ1_1: Q1.1 R6.2 | length 75
  Top Layer w20: Q1.1 R6.2
NetQ2_1: Q2.1 R19.2 | length 74.6
  Top Layer w20: Q2.1 773.82,270.91 781.54,263.19 R19.2
NetR1_1: R1.1 R2.2 R3.2 | length 208.6
  Top Layer w20: R2.2 490.08,961.51 518.15,933.44 R3.2 592.58,935.94 592.58,1014.92 R1.1
NetR12_1: R12.1 R13.2 R15.2 | length 213.7
  Top Layer w20: R13.2 507.72,350.55 507.72,335.93 519.43,324.21 R15.2 R12.1
pads on no net: IC1.13 IC2.13 IC3.13 J2.A2 J2.A3 J2.A4 J2.A6 J2.A7 J2.A8 J2.A10 J2.A11 J2.B2 J2.B3 J2.B6 J2.B7 J2.B8 J2.B9 J2.B10 J2.B11 J2.Shell
copper on no net: | length 0.1
  Top Layer w30: 1570,888.11 1570.08,888.19

## Polygon pours and split planes (outlines as drawn)
GND on Bottom Layer "GND_L02_P004" (solid, pour order 4): 0,0 0,1299.21 2716.54,1299.21 2716.54,0
GND on Top Layer "GND_L01_P005" (solid, pour order 5): 0,0 0,1299.21 2716.54,1299.21 2716.54,0

## Silkscreen, mask and mechanical layers (free items; w line width, h text height)
Top Overlay:
  drawing of 53 lines, arcs and shapes, not listed
  text "supply" at 2150,1213.33 h40
  text "output" at 2450,903.33 h40
  text "active differential probe" at 1702.52,180 h30
  text "by joel & basti" at 1702.52,130 h30
  text "v1" at 1702.52,70 h30
Bottom Overlay:
  lines w10: 1430,665 1525,760 ; 1800,685 1840,390

## Text inside footprints (layer, text, board x,y; h text height)
J2: Mechanical 2 "PCB Edge" at 1996.06,1322.83 h24 r180